# Altium PCB 动捕_WYJ_2023.12.7_2023-12-07.pcbdoc
Units mil, origin at the board's own origin, x right, y up, seen from the top; angles counter-clockwise.
Board outline 2370.33 x 2196 mil, 2 copper layers (Top Layer, Bottom Layer); 49 components, 36 nets, 186 pads, 105 vias.
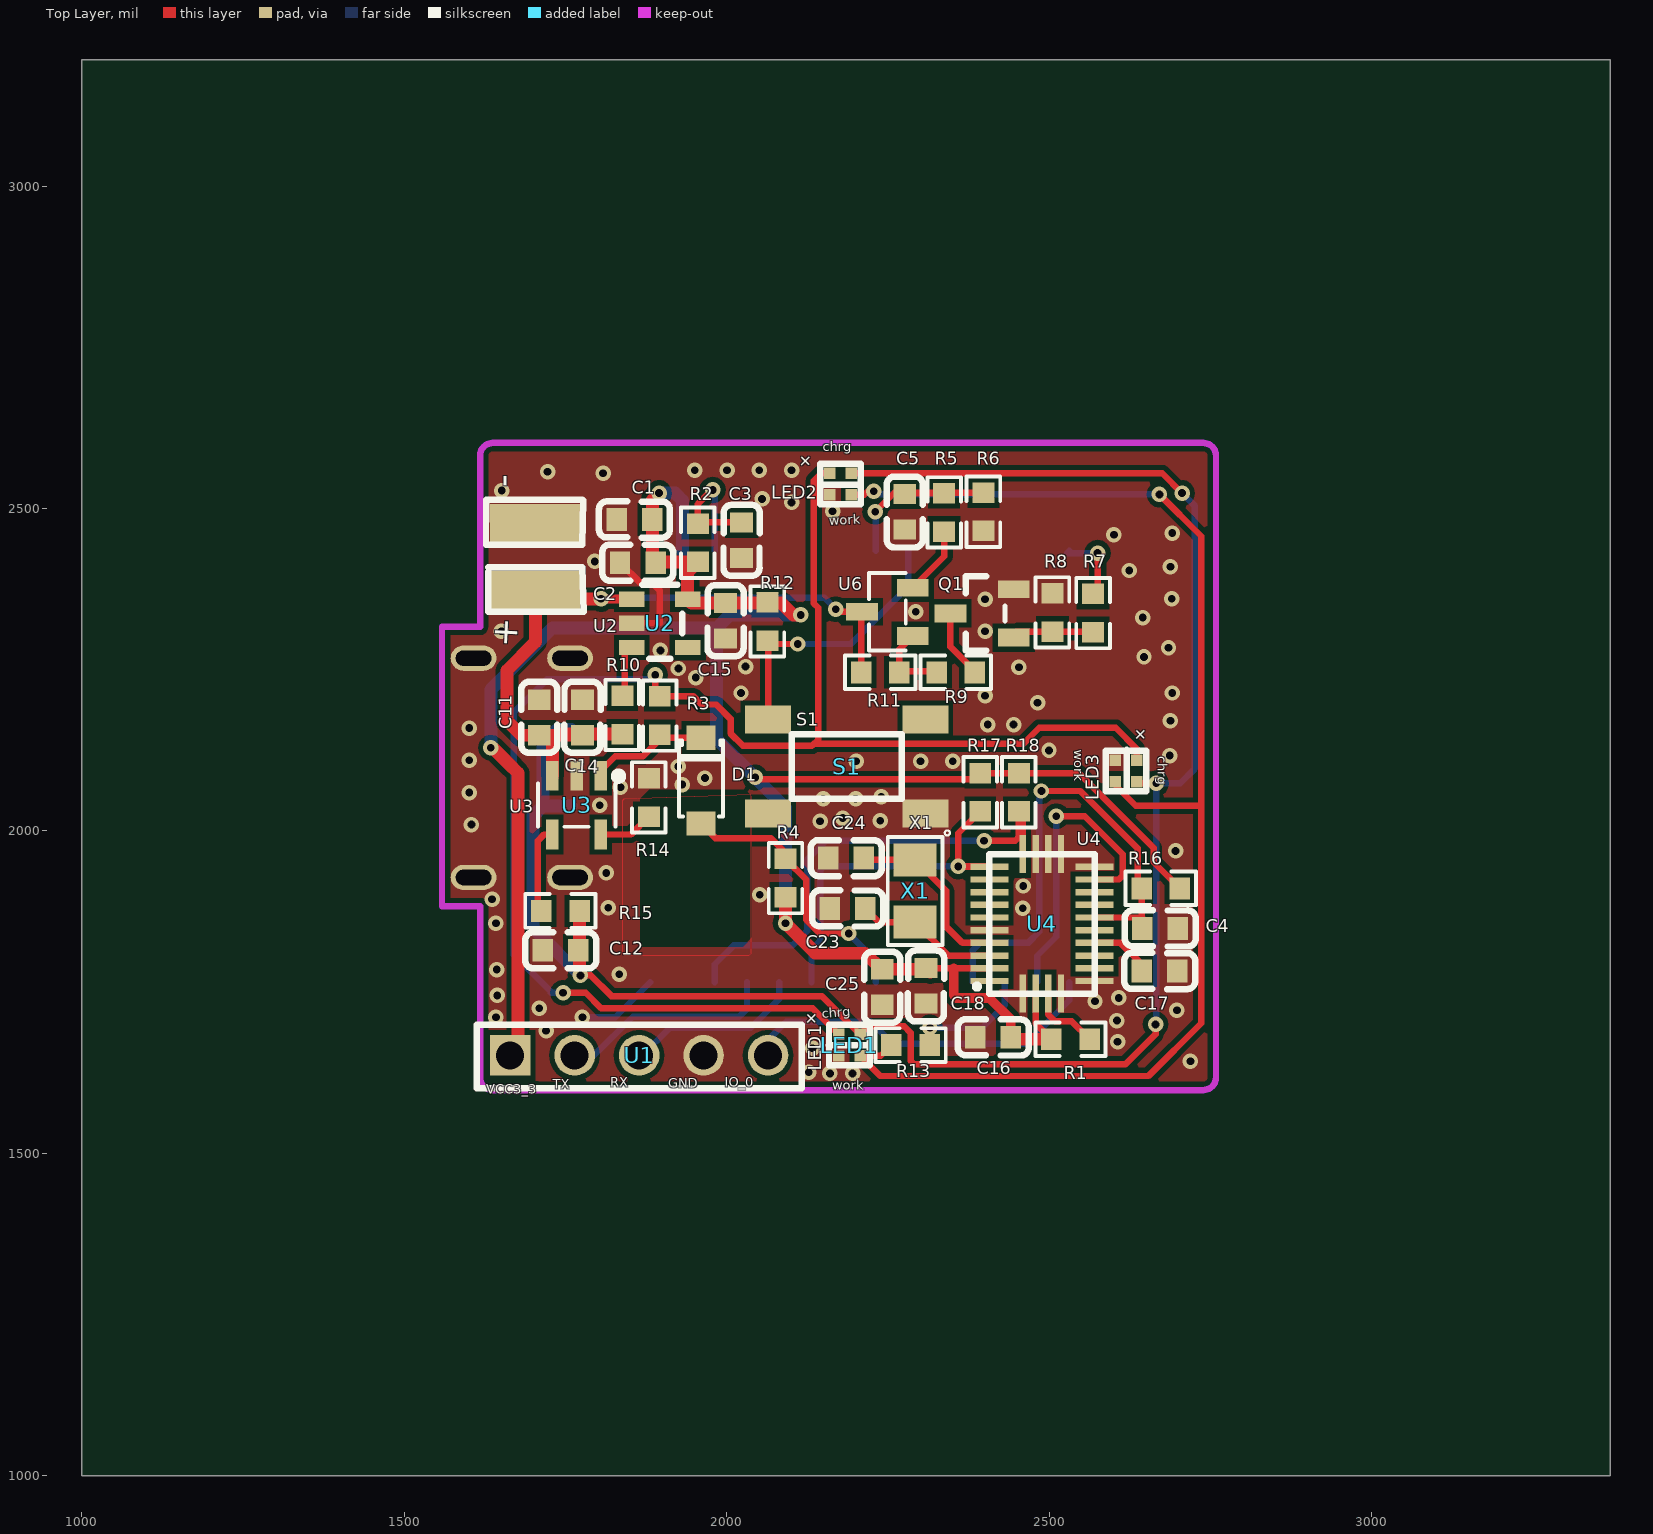
[diagram p0: Top Layer view]
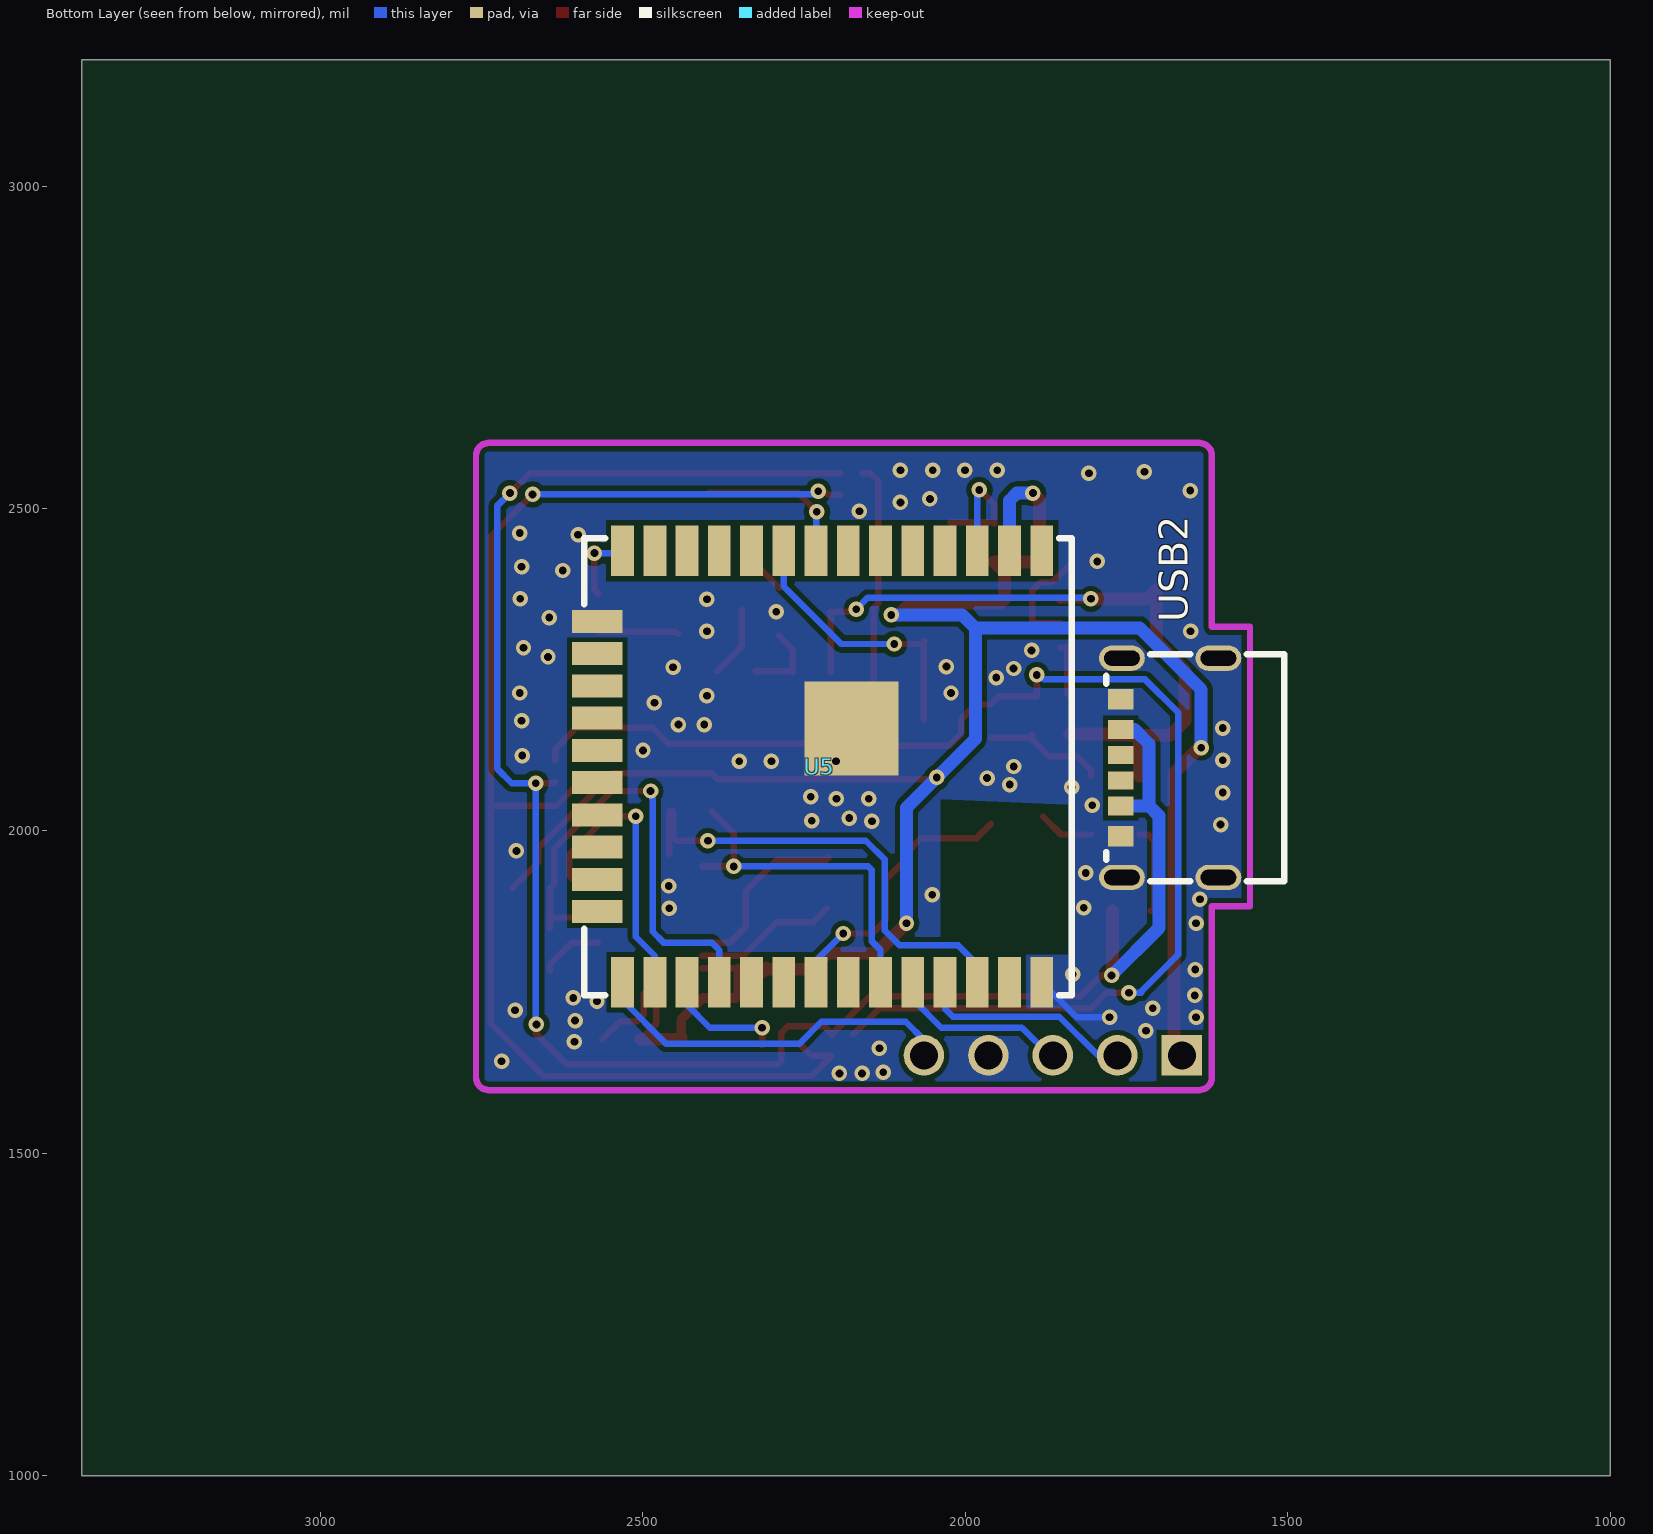
[diagram p1: Bottom Layer view, seen from below]

## Layer stack, top to bottom
Top Solder: solder mask 0.4, Solder Resist, Dk 3.5
Top Layer: signal copper 1.4
Dielectric1: dielectric 12.6, FR-4, Dk 4.8
Bottom Layer: signal copper 1.4
Bottom Solder: solder mask 0.4, Solder Resist, Dk 3.5

## Board outline
3370.33,1000 1000,1000 1000,3196 3370.33,3196

## Design rules (kind name [scope] priority, off if disabled: settings)
Clearance [All] p1: gap=8 ignorepadtopadclearanceinfootprint=FALSE except(0: Arc-Hole Track-Hole SMDPad-Hole THPad-Hole Via-Hole Fill-Hole Poly-Hole Region-Hole Text-Hole)
PolygonConnect [All] p1: connectstyle=Direct reliefconductorwidth=10 reliefentries=4 polygonreliefangle="90 Angle" airgapwidth=10
RoutingVias [All] p1: holewidth=28 width=50 viastyle="Through Hole" minholewidth=10 minwidth=20 maxholewidth=28 maxwidth=50
SolderMaskExpansion [All] p1: expansion=4 istentingtop=FALSE
Width [All] p1: maxlimit=30 minlimit=10 preferedwidth=10 minimp=50.000000 maximp=50.000000 favimp=50.000000
30 further rules are at their usual default settings.

## Components (designator, comment, footprint, x,y, rotation, side; value= is the part's Value field where it differs from the comment)
C1 "100nF" C0603 1857.33,2483 r0 top
C2 "10uF" C0603 1862.33,2416 r0 top
C3 "1uF" C0603 2023.33,2451 r90 top
C4 "100nF" C0603 2672.33,1849 r180 top
C5 "100nF" C0603 2276.33,2495 r90 top
C11 "1uF" C0603 1709.33,2176 r270 top
C12 "10uF" C0603 1742.33,1815 r180 top
C14 "10uF" C0603 1776.33,2176 r270 top
C15 "1uF" C0603 1998.33,2326 r270 top
C16 "100nF" C0603 2413.33,1680 r180 top
C17 "100nF" C0603 2671.33,1783 r180 top
C18 "120nF" C0603 2309.33,1760 r90 top
C23 "12pF" C0603 2187.33,1880 r180 top
C24 "12pF" C0603 2185.33,1958 r180 top
C25 "6.8nF" C0603 2241.33,1758 r90 top
D1 "1N4007W" SOD-123_L2.8-W1.8-LS3.7-RD 1960.33,2078 r270 top
LED1 "双色灯" ?#1 2190.33,1668 r180 top
LED2 "双色灯" ?#1 2176.82,2538 r180 top
LED3 "双色灯" ?#1 2619.33,2093 r90 top
Q1 "2N3904(SOT-23)" SOT-23-3_L2.9-W1.3-P1.90-LS2.4-TR 2396.33,2337.39 r0 top
R1 "10k" R0603 2533.33,1677 r0 top
R2 "10k" R0603 1955.33,2447 r270 top
R3 "470" R0603 1896.33,2179 r270 top
R4 "1k" R0603 2091.33,1927 r270 top
R5 "2K" R0603 2337.33,2494 r270 top
R6 "1M" R0603 2398.33,2495 r90 top
R7 "1k" R0603 2568.33,2338 r270 top
R8 "10k" R0603 2505.33,2339 r270 top
R9 "10k" R0603 2355.33,2246 r180 top
R10 "100k" R0603 1838.33,2180 r90 top
R11 "10k" R0603 2238.33,2246 r180 top
R12 "10k" R0603 2063.33,2325 r90 top
R13 "470" R0603 2285.33,1668 r180 top
R14 "2k" R0603 1879.33,2052 r270 top
R15 "1k" R0603 1742.33,1876 r0 top
R16 "10k" R0603 2673.33,1911 r180 top
R17 "10k" R0603 2393.33,2060 r90 top
R18 "10k" R0603 2453.33,2060 r90 top
S1 "按键" ?#2 2186.33,2100 r90 top
U1 "双塑单排排针5PIN2.54间距" HDR-TH_5P-P2.54-V-M-A 1864.33,1652 r0 top
U2 "TPAP2112K-3.3TRG1" SOT-23-5_L2.9-W1.6-P0.95-LS2.8-BR 1896.33,2322 r180 top
U3 "TP4054" SOT-23-5_L3.0-W1.7-P0.95-LS2.8-BL 1767.33,2040 r180 top
U4 "BNO055" 055 2489.33,1854 r0 top
U5 "ESP32-WROOM-32U(4MB)" WIFI-SMD_ESP32-WROOM-32UE-A 2226.33,2100 r90 bottom
U6 "CJ2305" SOT-23-3_L2.9-W1.3-P0.95-LS2.4-BR 2249.33,2340 r0 top
USB2 "TYPE-C 6P(040新)" USB-C-SMD_TYPE-C-6P 1683.33,2098 r270 bottom
X1 "贴片晶振32.768K" OSC-SMD_2P-L3.2-W1.5-1 2292.33,1907 r270 top
? "" ?#3 2423.97,1934.64 r0 top
? "" ?#3 2469.33,2091.1 r0 top

## Footprints (in the part's own frame and the unit in brackets; to place one, negate y for a bottom-side part, rotate by r counter-clockwise, add the part's x,y. Pads: shape width x height; smd on the part's side, far side on the other; paste and mask are expansions set on the pad)
055 [mm]
  rect 1.5x0.25 smd: 1(-2.07,-2.201) 6(2.056,-2.201) 7(2.056,-1.701) 8(2.056,-1.201) 9(2.056,-0.701) 10(2.056,-0.201) 11(2.056,0.299) 12(2.056,0.799) 13(2.056,1.299) 14(2.056,1.799) 15(2.056,2.299) 20(-2.07,2.299) 21(-2.07,1.799) 22(-2.07,1.299) 23(-2.07,0.799) 24(-2.07,0.299) 25(-2.07,-0.201) 26(-2.07,-0.701) 27(-2.07,-1.201) 28(-2.07,-1.701)
  rect 0.25x1.5 smd: 2(-0.757,-2.701) 3(-0.257,-2.701) 4(0.243,-2.701) 5(0.743,-2.701) 16(0.743,2.799) 17(0.243,2.799) 18(-0.257,2.799) 19(-0.757,2.799)
  silkscreen extent -2.67,-2.7 2.08,2.8
C0603 [mm]
  rect 0.8x0.9 smd: 1(-0.7,0) 2(0.7,0)
  silkscreen extent -1.41,-0.71 1.39,0.72
HDR-TH_5P-P2.54-V-M-A [mm]
  rect 1.6x1.6 hole 1.1: 1(-5.08,0)
  round 1.6 hole 1.1: 2(-2.54,0) 3(0,0) 4(2.54,0) 5(5.08,0)
  silkscreen extent -6.4,-1.3 6.4,1.2
OSC-SMD_2P-L3.2-W1.5-1 [mm]
  rect 1.3x1.7 smd: 1(-1.225,0) 2(1.225,0)
  silkscreen extent -2.39,-1.08 2.13,1.37
R0603 [mil]
  rect 31.75x34.02 smd: 1(-29.66,0) 2(29.66,0)
  silkscreen extent -55,-26 55,26
SOD-123_L2.8-W1.8-LS3.7-RD [mm]
  rect 0.95x1.15 smd: 1(-1.693,0) 2(1.693,0)
  silkscreen extent -1.58,-0.87 1.41,0.87
SOT-23-3_L2.9-W1.3-P0.95-LS2.4-BR [mm]
  rect 1.25x0.7 smd: 1(1,-0.95) 2(1,0.95) 3(-1,0)
  silkscreen extent -0.73,-1.53 0.73,1.53
SOT-23-3_L2.9-W1.3-P1.90-LS2.4-TR [mm]
  rect 1.25x0.7 smd: 1(1.25,0.95) 2(1.25,-0.95) 3(-1.25,0)
  silkscreen extent -0.65,-1.46 0.9,1.46
SOT-23-5_L2.9-W1.6-P0.95-LS2.8-BR [mm]
  rect 1x0.6 smd: 1(1.1,-0.95) 2(1.1,0) 3(1.1,0.95) 4(-1.1,0.95) 5(-1.1,-0.95)
  silkscreen extent -0.89,-1.52 0.7,1.4
SOT-23-5_L3.0-W1.7-P0.95-LS2.8-BL [mm]
  rect 0.49x1.157 smd: 1(-0.95,-1.154) 2(0,-1.154) 3(0.95,-1.154)
  rect 0.49x1.175 smd: 4(0.95,1.154) 5(-0.95,1.154)
  silkscreen extent -1.8,-1.29 1.53,0.85
USB-C-SMD_TYPE-C-6P [mm]
  oval 1x1.8 hole 0.6 slot 1.4 at 90 deg: 1(4.32,-1.875) 1(4.32,1.925) 2(-4.32,-1.875) 2(-4.32,1.925)
  rect 0.7x1 smd: A5(0.499,-1.925) B5(-0.501,-1.925)
  rect 0.75x1 smd: A9(-1.501,-1.925) B9(1.499,-1.925)
  rect 0.8x1 smd: A12(-2.701,-1.925) B12(2.699,-1.925)
  silkscreen extent -4.47,-2.5 4.47,4.52
WIFI-SMD_ESP32-WROOM-32UE-A [mm]
  rect 2x0.9 smd: 1(8.5,-8.755) 2(8.5,-7.485) 3(8.5,-6.215) 4(8.5,-4.945) 5(8.5,-3.675) 6(8.5,-2.405) 7(8.5,-1.135) 8(8.5,0.135) 9(8.5,1.405) 10(8.5,2.675) 11(8.5,3.945) 12(8.5,5.215) 13(8.5,6.485) 14(8.5,7.755) 25(-8.5,7.755) 26(-8.5,6.485) 27(-8.5,5.215) 28(-8.5,3.945) 29(-8.5,2.675) 30(-8.5,1.405) 31(-8.5,0.135) 32(-8.5,-1.135) 33(-8.5,-2.405) 34(-8.5,-3.675) 35(-8.5,-4.945) 36(-8.5,-6.215) 37(-8.5,-7.485) 38(-8.5,-8.755)
  rect 0.9x2 smd: 15(5.715,8.755) 16(4.445,8.755) 17(3.175,8.755) 18(1.905,8.755) 19(0.635,8.755) 20(-0.635,8.755) 21(-1.905,8.755) 22(-3.175,8.755) 23(-4.445,8.755) 24(-5.715,8.755)
  rect 3.7x3.7 smd: 39(1.5,-1.255)
  silkscreen extent -9.02,-9.95 9,9.27
?#1 [mm]
  rect 0.45x0.45 smd: 1(-0.425,0.425) 2(0.425,0.425) 3(-0.425,-0.425) 4(0.425,-0.425)
  silkscreen extent -0.8,-0.8 0.8,0.8
?#2 [mm]
  rect 1.1x1.8 smd: 1(-1.85,3.1) 2(-1.85,-3.1) 3(1.85,3.1) 4(1.85,-3.1)
  silkscreen extent -1.27,-2.16 1.27,2.16
?#3 [mm]

## Free pads (board coordinates)
  rect 140x60 smd: 1(1703.33,2374) 2(1703.33,2477)

## Via types
v1: diameter 24, hole 12, Top Layer to Bottom Layer, tented both sides, 105 vias

## Nets (pads, with @x,y where several pads share a name; then routed paths per layer and width w, separated by ;. In a path a pad name is that pad's centre, name@x,y a point inside that pad or via, vN(x,y) a via of type N, cw(c..) or ccw(c..) an arc to the next point about the centre after c; other vN are vias at no path point)
CHRG: D1.2 R4.1 U5.31 | length 435
  Top Layer w10: D1.2 1982.7,1989 2068.33,1989 2091.33,1966 R4.1 ; R4.1 2123.33,1924.7 2123.33,1862 2144.33,1841 v1(2189.33,1841)
  Bottom Layer w10: v1(2189.33,1841) 2231.64,1798.69 U5.31@2231.64,1765.35
EN: C3.2 R2.1 U5.3 | length 227
  Top Layer w10: v1(1978.33,2529) 1977.33,2529 1955.33,2507 R2.1 1957.23,2478.56 C3.2
  Bottom Layer w10: v1(1978.33,2529) 1981.64,2525.69 U5.3@1981.64,2434.65
GND: C1.1 C2.1 C3.1 C4.1 C5.1 C11.1 C12.2 C14.1 C15.2 C16.2 C17.1 C18.1 C23.2 C24.2 C25.1 LED1.2 LED2.2 LED3.2 pad.2 Q1.1 R6.1 R8.1 R14.1 S1.2 U1.4 U2.2 U3.2 U4.2 U4.5 U4.6 U4.15 U4.16 U4.17 U4.18 U4.25 U5.15 U5.38 U5.39 USB2.1 USB2.2 USB2.A12 USB2.B12 | length 301.5
  Top Layer w10: C2.1 1864.77,2386 1883.33,2386 1896.33,2373 1896.33,2322 U2.2
  Bottom Layer w10: v1(1776.33,1711) 1827.29,1711 U5.38@1881.64,1765.35
  other v1: 2160.33,1624 2195.33,1624 2127.33,1626 2719.33,1643 2133.33,1663 2606.33,1673 1720,1690 2605.33,1706 1642.33,1711 2698.33,1722 1709.33,1725 2571.33,1736 2608.33,1741 1644.33,1745 1833.33,1778 1643.33,1785 1642.33,1857 2459.33,1880 1816.33,1881 1636.33,1894 2051.33,1901 2460,1914.67 1813.33,1935 2696.33,1969 1604.33,2010 2145,2015 2238.33,2016 2180,2020 1803.33,2040 2150,2050 2200,2050 2240,2053 1600.77,2059.57 1835.33,2068 1931.33,2072 1966.33,2082 1925,2100 2200.77,2108 2300.77,2108 2350.77,2108 1600.77,2109.57 2687.33,2117 2500,2125 1600.77,2159.57 2405,2165 2445,2165 2688.33,2171 2482.33,2199 2400.77,2209.57 2022.33,2214 2691.33,2214 1952.33,2238 1925.33,2252 2453.33,2254 2029.33,2255 2647.33,2270 1897.33,2280 2685.33,2284 1650.77,2309.57 2400.77,2309.57 2645.33,2331 2293.33,2340 2400.77,2359.57 2690.33,2360 2624.33,2404 2688.33,2410 1795.33,2418 2600.77,2459.57 2691.33,2462 2164.33,2496 2100.77,2509.57 2055,2515 1651.33,2528 1808.33,2555 1722.33,2557 1950.77,2559.57 2000.77,2559.57 2050.77,2559.57 2100.77,2559.57
INT: U4.14 U5.26 | length 477
  Top Layer w10: v1(2511.33,2023) 2555.33,2023 2614.33,1964 2614.33,1931 2608.13,1924.8 U4.14
  Bottom Layer w10: U5.26@2481.64,1765.35 2481.64,1806.31 2511.33,1836 v1(2511.33,2023)
IO0: U1.5 U5.25 | length 572.9
  Bottom Layer w10: U1.5 2064.33,1676 2092.33,1704 2223.33,1704 2257.33,1670 2464.33,1670 2531.63,1737.3 U5.25@2531.63,1765.3
IO33: R12.1 S1.3 U5.9 | length 435.8
  Top Layer w10: S1.3 2064.28,2294.39 R12.1 2068.67,2290 v1(2110.33,2290)
  Bottom Layer w10: v1(2110.33,2290) 2192.33,2290 2281.63,2379.3 U5.9@2281.63,2434.7
LED: LED1.1 LED2.1 LED3.1 R13.2 | length 2113.3
  Top Layer w10: LED2.1 2213.6,2521.27 2219.33,2527 v1(2228.33,2527) ; LED1.1 2238.94,1651.27 R13.2 ; LED1.1@2207.03,1651.3 2238.33,1620 2286.26,1620 2343.7,1619.99 2654.33,1620 2736.33,1702 2736.33,2039 ; LED3.1 2602.6,2070.73 2634.33,2039 2736.33,2039 ; v1(2671.33,2522) 2736.33,2457 2736.33,2039
  Bottom Layer w10: v1(2228.33,2527) 2233.33,2522 v1(2671.33,2522)
POWER: C5.2 R5.1 R6.2 U5.8 | length 364.1
  Top Layer w10: v1(2230.33,2495) 2260.03,2524.7 R6.2 ; C5.2 2277.43,2523.66 R5.1 2338.33,2524.66 R6.2
  Bottom Layer w10: v1(2230.33,2495) 2231.64,2493.69 U5.8
POWEREN: R7.1 U5.14 | length 118.7
  Top Layer w10: R7.1 2575.33,2374.66 v1(2575.33,2431)
  Bottom Layer w10: U5.14@2531.63,2434.7 2528.03,2431 v1(2575.33,2431)
R3_1: LED1.4 LED2.4 LED3.4 R3.1 | length 2485.8
  Top Layer w10: v1(1746.33,1749) 1781.33,1749 1805.33,1725 2133.33,1725 LED1.4 ; v1(1889.33,2242) 1889.33,2208.66 1948.67,2208.66 1961.16,2196.16 1983.84,2196.16 2006.16,2173.84 2006.16,2151.16 2025.33,2132 2132.33,2132 2142,2141.67 2142,2346.18 2135.33,2352.86 2135.33,2543 2147.06,2554.73 LED2.4 ; 2135.33,2135 2460,2135 2485,2160 2603.33,2160 2636.06,2127.27 LED3.4
  Bottom Layer w10: v1(1746.33,1749) 1727.33,1749 1727.33,1751 1670,1808.33 1670,2183.67 1721.33,2235 1878.54,2235 1885.54,2242 v1(1889.33,2242)
R5_2: R5.2 U6.2 | length 107.1
  Top Layer w10: U6.2 2337.33,2426.03 R5.2
R7_2: Q1.2 R7.2 R8.2 | length 126.7
  Top Layer w10: Q1.2@2445.53,2305.6 2449.27,2309.34 R8.2 ; R8.2 2569.33,2309.3 R7.2
R9_1: Q1.3 R9.1 | length 110.7
  Top Layer w10: Q1.3@2347.13,2343 2347.13,2285.86 R9.1@2384.99,2248
R14_2: R14.2 U3.5 | length 86.1
  Top Layer w10: U3.5 1851.61,1994.58 R14.2
RESET: C4.2 R16.2 U4.11 U5.28 | length 789
  Top Layer w10: v1(2488.33,2062) 2548.33,2062 2637.33,1973 2637.33,1917.3 2643.63,1911 2643.67,1850.1 C4.2 2644.73,1865.8 U4.11
  Bottom Layer w10: U5.28@2381.63,1765.3 2381.63,1815.3 2393.33,1827 2468.33,1827 2485,1843.67 2485,2049.14 2485.65,2049.79 2485.65,2059.32 v1(2488.33,2062)
RXD0: U1.3 U5.34 | length 279.5
  Bottom Layer w10: U1.3 1869.33,1652 1912.33,1695 2037.33,1695 2081.63,1739.3 U5.34@2081.63,1765.3
S$28539: 
S$28543: 
S$28547: 
S$31839: 
S$37877: 
SCL: R18.1 U4.19 U5.36 | length 757.5
  Top Layer w10: v1(2399.33,1985) 2447.47,1985 2453.33,1990.86 R18.1 2459.33,2030.3 U4.19
  Bottom Layer w10: U5.36@1981.63,1765.3 1981.63,1793.3 2011.33,1823 2102.33,1823 2124.83,1845.5 2124.83,1955.5 2154.33,1985 v1(2399.33,1985)
SDA: R17.1 U4.20 U5.33 | length 594.1
  Top Layer w10: v1(2359.33,1945) 2407.35,1945 U4.20 ; R17.1 2359.33,1996.3 2359.33,1944.5 U4.20 ; U4.20@2407.96,1945.31 2407.96,1944.63 U4.20
  Bottom Layer w10: U5.33@2131.63,1765.3 2131.63,1815.3 2145,1828.67 2145,1939.14 2150.86,1945 v1(2359.33,1945)
TXD0: U1.2 U5.35 | length 338.2
  Bottom Layer w10: U1.2 1794.33,1652 1854.33,1712 2019.33,1712 2031.63,1724.3 U5.35@2031.63,1765.3
U2_3: R10.2 U2.3 | length 87.3
  Top Layer w10: R10.2 1842.33,2213.7 1842.33,2284.6 U2.3
U3_1: D1.1 R3.2 U3.1 | length 193
  Top Layer w10: U3.1 1804.73,2093.4 1827.33,2116 1870.33,2116 1896.33,2142 R3.2 1901.04,2144.63 D1.1
U3_4: R15.1 U3.4 | length 140.9
  Top Layer w10: R15.1 1707.33,1876 1707.33,1985 1716.91,1994.58 U3.4
U4_4: R1.2 U4.4 | length 112.3
  Top Layer w10: U4.4 2498.93,1715.4 2509.33,1705 2535.03,1705 R1.2
U4_9: C17.2 U4.9 | length 97.6
  Top Layer w10: U4.9 2610.93,1826.4 2643.73,1793.6 C17.2@2643.73,1783
U4_26: C24.1 U4.26 X1.1 | length 281.8
  Top Layer w10: C24.1 2215.66,1955.23 X1.1 ; X1.1 2340.33,1907.2 2340.33,1852 2365.93,1826.4 U4.26
U4_27: C23.1 U4.27 X1.2 | length 223.3
  Top Layer w10: C23.1 2236.12,1858.77 X1.2 2344.38,1806.72 U4.27
U5_27: R13.1 U5.27 | length 193.1
  Top Layer w10: R13.1 2314.99,1694.66 v1(2315.33,1695)
  Bottom Layer w10: v1(2315.33,1695) 2396.33,1695 2431.64,1730.31 U5.27@2431.64,1765.35
U6_1: R9.2 R11.1 U6.1 | length 123.7
  Top Layer w10: U6.1 2267.99,2281.89 R11.1 2269.99,2248 R9.2@2325.67,2248
VBAT: C11.2 C14.2 pad.1 R10.1 R11.2 U2.1 U3.3 U6.3 | length 1273.4
  Top Layer w10: 1729.93,2140.2 1721.69,2148.44 C11.2 C14.2 ; v1(2169.33,2344) 2173.33,2340 U6.3 2208.67,2338.71 R11.2
  Top Layer w15: v1(1805.33,2360) U2.1
  Top Layer w20: C11.2 1681.93,2148.4 1659.33,2171 1659.33,2249 1703.33,2293 pad.1 1702.33,2375 1717.33,2360 v1(1805.33,2360) ; C11.2 C14.2 ; U3.3 1729.93,2140.2 1740.07,2150.34 R10.1
  Bottom Layer w10: v1(1805.33,2360) 1807.33,2362 2151.32,2362 v1(2169.33,2344)
VBUS: C12.1 LED1.3 LED2.3 LED3.3 R15.2 USB2.A9 USB2.B9 | length 3048.1
  Top Layer w10: v1(1773.33,1776) 1789.33,1776 1821.33,1744 2147.73,1744 2207.03,1684.7 2219.33,1697 2275.33,1697 2285.33,1687 2285.33,1643.86 2291.19,1637.99 2336.24,1637.99 2618.33,1638 2665.33,1685 v1(2665.33,1700) ; LED2.3@2193.55,2554.73 2675.59,2554.73 v1(2706.33,2524) ; LED3.3 2636.55,2076.27 2638.82,2074 v1(2666.33,2074)
  Top Layer w20: R15.2 1771.99,1815 1771.99,1795.4 1771.99,1777.34 v1(1773.33,1776)
  Bottom Layer w10: v1(2665.33,1700) 2666.33,1701 v1(2666.33,2074) 2703.33,2074 2726.33,2097 2726.33,2504 v1(2706.33,2524)
  Bottom Layer w20: USB2.B9 1715.33,2039 ; USB2.A9 1737.43,2157.1 1715.33,2135 1715.33,2039 ; v1(1773.33,1776) 1700,1849.33 1700,2023.67 1715.33,2039
VCC_3V3: C1.2 C2.2 C15.1 C16.1 C18.2 C25.2 R1.1 R2.2 R4.2 R12.2 R16.1 R17.2 R18.2 U1.1 U2.5 U4.3 U4.28 U5.2 | length 3702.6
  Top Layer w10: C15.1 2062.23,2353.56 R12.2 ; v1(2044.33,2083) 2048.12,2083 2051.12,2080 2383.67,2080 R17.2 R18.2 ; C18.2 2309.9,1787.03 2352.04,1787.03 U4.28 ; R18.2 2546.63,2089.7 2662.64,1973.69 2662.64,1951.39 R16.1 ; U4.3 2479.21,1701.46 R1.1
  Top Layer w15: 2352.04,1787.03 2352.04,1745.29 2356.33,1741 2407.33,1741 2440.89,1707.44 C16.1
  Top Layer w20: v1(1634.33,2129) 1637.33,2129 1661.33,2105 1676.33,2090 1676.33,1664 U1.1 ; v1(1895.33,2524) 1884.89,2513.56 C1.2 1884.89,2421 C2.2 1891.23,2417.34 R2.2 1939.64,2401.65 U2.5 1945.48,2353.56 C15.1 2084.77,2353.56 2103.33,2335 v1(2115,2335) ; R4.2 v1(2091.33,1857) 2137.33,1811 2214.33,1810 C25.2 ; C25.2 2307.33,1785.56 C18.2 C18.2@2315.89,1781 ; C16.1 2443.89,1677 R1.1
  Bottom Layer w20: v1(1634.33,2129) 1634.33,2219.33 1730,2315 1985,2315 ; v1(1895.33,2524) 1920.33,2524 1931.64,2512.69 U5.2 ; v1(2091.33,1857) 2091.33,2036 v1(2044.33,2083) 1984.33,2143 1984.33,2314.33 2005,2335 v1(2115,2335)
pads on no net: S1.1 S1.4 U2.4 U4.1 U4.7 U4.8 U4.10 U4.12 U4.13 U4.21 U4.22 U4.23 U4.24 U5.1 U5.4 U5.5 U5.6 U5.7 U5.10 U5.11 U5.12 U5.13 U5.16 U5.17 U5.18 U5.19 U5.20 U5.21 U5.22 U5.23 U5.24 U5.29 U5.30 U5.32 U5.37 USB2.A5 USB2.B5

## Polygon pours and split planes (outlines as drawn)
GND on Top Layer "Top Layer-GND 1" (solid, remove dead copper, pour order 1): 1563.33,2696 1545.33,2678 1545.33,1500 1567.33,1522 2870.33,1522 2841.33,1551 2841.33,2696
GND on Top Layer "Top Layer-GND" (solid, pour order 0): 1840.33,2049 1838.33,2047 1838.33,1810 1841.33,1807 2035.33,1807 2038.33,1810 2038.33,2055 2037.33,2056
GND on Bottom Layer "Bottom Layer-GND 1" (solid, remove dead copper, pour order 3): 1505.33,2692 1538.33,2659 1538.33,1525 1556.33,1507 2864.33,1507 2856.33,1515 2856.33,2696

## Keep-outs
Keep-Out Layer:
  lines w10: 1558.57,1883.46 1617.63,1883.46 1617.63,1617.91 ccw(c1637.31,1617.91) 1637.31,1598.23 2739.28,1598.23 ccw(c2739.28,1617.91) 2758.97,1617.91 2758.97,2582.09 ccw(c2739.28,2582.09) 2739.28,2601.77 1637.31,2601.77 ccw(c1637.31,2582.09) 1617.63,2582.09 1617.63,2316.53 1558.57,2316.53 1558.57,1883.46

## Other copper
Top Layer:
  pour cut-out: 1865,1820 1865,2050 1880,2065 2028.33,2065 2040,2053.33 2040,1835 2025,1820
Bottom Layer:
  pour cut-out: 1840.33,2041.01 1840.33,1808 2036.33,1808 2039.33,1811 2039.33,2048.97

## Silkscreen, mask and mechanical layers (free items; w line width, h text height)
Top Overlay:
  lines w10: 1627.33,2513 1626.83,2444 1775.83,2444 1777.33,2513 ; 1627.33,2514 1776.33,2514 ; 1630.33,2402 1630.33,2340 1778.33,2340 1776.33,2409 1739.33,2409 1630.33,2409 ; 2145.33,2537 2208.32,2537 ; 2158.33,1668 2221.32,1668 ; 2620.33,2063 2620.33,2125.99
  text "chrg" at 2149,2589 h15
  text "+" at 2136.37,2571.85 h20 r135
  text "-" at 1671.99,2533 h40 r90
  text "work" at 2158.81,2474.18 h15 r2.68
  text "+" at 1681.94,2324.06 h40 r177.2
  text "U2" at 1793,2308 h20
  text "S1" at 2108,2163 h20
  text "+" at 2656.04,2147.36 h20 r135
  text "work" at 2539,2126 h15 r270
  text "chrg" at 2669,2116 h15 r270
  text "U3" at 1663,2028 h20
  text "X1" at 2283,2003 h20
  text "U4" at 2543,1978 h20
  text "chrg" at 2148.26,1709.29 h15 r4.62
  text "+" at 2146.04,1707.36 h20 r135
  text "LED1" at 2147,1628 h20 r90
  text "IO_0" at 1996.82,1603.5 h15
  text "RX" at 1819.82,1603.1 h15
  text "GND" at 1909.82,1602.1 h15
  text "TX" at 1730.31,1600.11 h15
  text "work" at 2164,1599 h15
  text "VCC3_3" at 1627.33,1592.5 h15
Mechanical 2:
  text "2k" at 2412,2483 h18 r90
  text "2k" at 2347,2478 h18 r90
  text "100nF" at 1820,2470 h18
  text "100nF" at 2287,2453 h18 r90
  text "10k" at 1967,2428 h18 r90
  text "1uF" at 2037,2428 h18 r90
  text "10uF" at 1833,2403 h18
  text "1k" at 2577.24,2323.22 h18 r85.6
  text "10k" at 2517,2318 h18 r90
  text "1uF" at 2007,2303 h18 r90
  text "10k" at 2077,2303 h18 r90
  text "pmos" at 2256,2303 h18 r90
  text "2112k" at 1897,2288 h18 r90
  text "2N3904" at 2422,2288 h18 r90
  text "10k" at 2333,2238 h18
  text "10k" at 2218,2233 h18
  text "1uF" at 1717,2163 h18 r90
  text "470" at 1902,2153 h18 r90
  text "10uF" at 1787,2148 h18 r90
  text "100k" at 1852,2148 h18 r90
  text "KEY" at 2168,2093 h18
  text "10k" at 2407,2043 h18 r90
  text "10k" at 2467,2043 h18 r90
  text "2k" at 1887,2038 h18 r90
  text "TP4054" at 1718,2033 h18
  text "1N4007W" at 1972,1983 h18 r90
  text "12pF" at 2158,1949 h18
  text "1k" at 2102.24,1913.22 h18 r85.6
  text "10k" at 2653,1898 h18
  text "12pF" at 2158,1869 h18
  text "0R" at 1733,1868 h18
  text "100nF" at 2633,1838 h18
  text "32.768KHz" at 2302,1833 h18 r90
  text "BNO055" at 2438,1833 h18
  text "10uF" at 1713,1808 h18
  text "100nF" at 2633,1768 h18
  text "6.8nF" at 2252,1718 h18 r90
  text "120nF" at 2322,1713 h18 r90
  text "100nF" at 2373,1668 h18
  text "10k" at 2513,1668 h18
  text "470" at 2258,1658 h18
Document:
  circle w10: c2186.04,2100.41 r43.31
  rectangle: 2100.83,2489 2267.83,2577
  rectangle: 2576.33,2016.5 2664.33,2183.5
  rectangle: 2102.83,1623 2269.83,1711
  rectangle: 1843.33,1738 2036.33,1982
  lines w10: 1505,1967.95 1701.85,1967.95 ; 1505,2231.73 1701.85,2231.73 ; 1567.99,1954.17 1567.99,1883.3 1619.17,1883.3 1619.17,1617.75 ; 1567.99,2245.51 1567.99,2316.37 1619.17,2316.37 1619.17,2581.92 ; 1591.75,1961 1652.77,1961 ; 1591.75,1987.22 1652.77,1987.22 ; 1591.75,2002.61 1652.77,2002.61 ; 1591.75,2198.2 1652.77,2198.2 ; 1591.75,2213.6 1652.77,2213.6 ; 1591.75,2239.82 1652.77,2239.82 ; 1619.17,1617.75 ccw(c1638.86,1617.75) 1638.86,1598.07 2740.82,1598.07 ; 1619.17,2581.92 cw(c1638.86,2581.92) 1638.86,2601.61 2740.82,2601.61 ; 1652.77,1954.74 1591.75,1954.74 1591.75,2246.08 1652.77,2246.08 ; 1701.85,2050.62 1721.54,2050.62 1721.54,2062.44 1701.85,2062.44 ; 1701.85,2074.25 1721.54,2074.25 1721.54,2086.06 1701.85,2086.06 ; 1701.85,2093.93 1721.54,2093.93 1721.54,2105.74 1701.85,2105.74 ; 1701.85,2113.62 1721.54,2113.62 1721.54,2125.43 1701.85,2125.43 ; 1701.85,2137.24 1721.54,2137.24 1721.54,2149.05 1701.85,2149.05 ; 2740.83,1598.07 ccw(c2740.83,1617.75) 2760.51,1617.75 2760.51,2581.92 ccw(c2740.83,2581.92) 2740.83,2601.61 ; 2758.14,1882.8 2758.14,1617.25 cw(c2738.45,1617.25) 2738.45,1597.56 1636.49,1597.57 cw(c1636.49,1617.25) 1616.8,1617.25 1616.8,2581.42 cw(c1636.49,2581.42) 1636.49,2601.11 2738.45,2601.11 cw(c2738.45,2581.42) 2758.14,2581.42 2758.14,2315.87 ; 2758.67,1618.32 2758.67,2582.49 ; 2758.68,1618.32 cw(c2738.99,1618.32) 2738.99,1598.64 1637.02,1598.64 cw(c1637.03,1618.32) 1617.34,1618.32 1617.34,1883.87 1558.28,1883.87 1558.28,2316.94 1617.34,2316.94 1617.34,2582.49 cw(c1637.03,2582.49) 1637.03,2602.18 2738.99,2602.18 cw(c2738.99,2582.49) 2758.68,2582.49 ; 1505,1954.17 1505,2245.51 1701.85,2245.51 1701.85,1954.17 1505,1954.17 ; 1713.6,2030.51 1792.34,2030.51 1792.34,2170.31 1713.6,2170.31 1713.6,2030.51 ; 1833.55,1745.51 2593.39,1745.51 2593.39,2454.17 1833.55,2454.17 1833.55,1745.51 ; 2083.68,1998.05 2288.4,1998.05 2288.4,2202.77 2083.68,2202.77 2083.68,1998.05 ; 2107.3,1627.97 2107.3,1706.71 2264.78,1706.71 2264.78,1627.97 2107.3,1627.97 ; 2107.3,2494.11 2264.78,2494.11 2264.78,2572.85 2107.3,2572.85 2107.3,2494.11 ; 2579.74,2030.51 2579.74,2170.31 2658.48,2170.31 2658.48,2030.51 2579.74,2030.51